# EAGLE board spb (EAGLE 5.10)
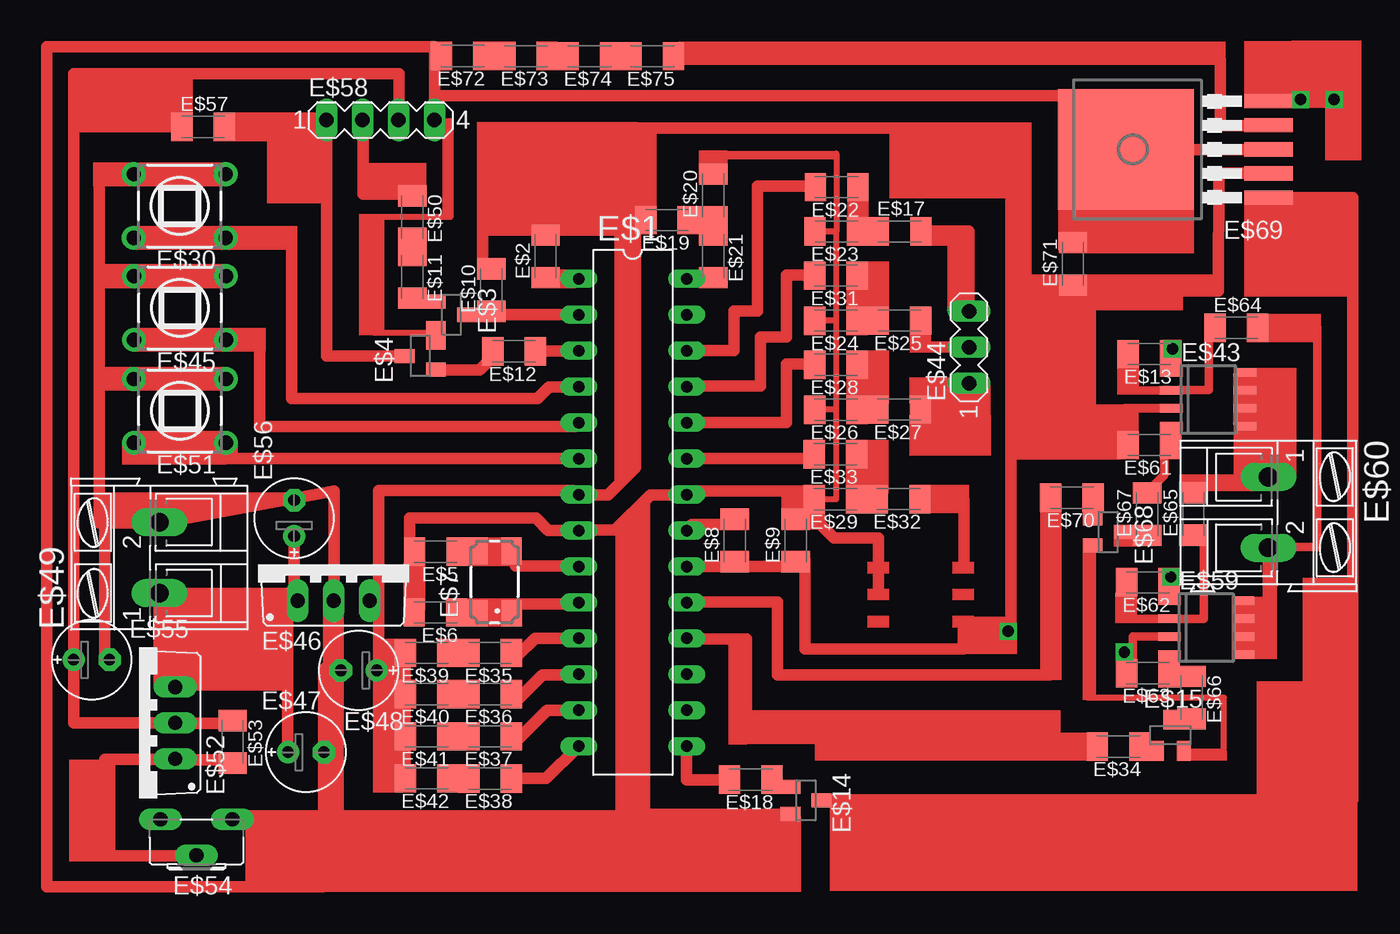
[diagram p0: board, top side]

No outline drawn. Coordinates in mm, seen from the top.
Copper layers (1*16): Top 0.035mm / dielectric 1.5mm / Bottom 0.035mm
Design rules "default": minimum track width 10mil, minimum drill 24mil, track to track 8mil, track to pad 8mil, pad to pad 8mil, via to via 8mil, smd to smd 8mil, copper to edge 40mil, drill to drill 8mil, minimum pad ring 10mil, minimum via ring 8mil, stop-mask expansion 4mil, vias tented up to drill 0mil, thermal gap 10mil

## Footprints (pad centres in the part's own frame; a part is rotated, then mirrored left to right if it is on the bottom)
DIL28-3 = drill 0.813 long: 1 -16.51,-3.81; 2 -13.97,-3.81; 3 -11.43,-3.81; 4 -8.89,-3.81; 5 -6.35,-3.81; 6 -3.81,-3.81; 7 -1.27,-3.81; 8 1.27,-3.81; 9 3.81,-3.81; 10 6.35,-3.81; 11 8.89,-3.81; 12 11.43,-3.81; 13 13.97,-3.81; 14 16.51,-3.81; 15 16.51,3.81; 16 13.97,3.81; 17 11.43,3.81; 18 8.89,3.81; 19 6.35,3.81; 20 3.81,3.81; 21 1.27,3.81; 22 -1.27,3.81; 23 -3.81,3.81; 24 -6.35,3.81; 25 -8.89,3.81; 26 -11.43,3.81; 27 -13.97,3.81; 28 -16.51,3.81
C1206K = smd 1.5 x 2: 1 -1.5,0; 2 1.5,0
SOT23 = smd 1 x 1.4: 1 -0.95,-1.1; 2 0.95,-1.1; 3 0,1.1
CTS406 = smd 1.9 x 1.4: 1 -2.2,-1.2; 2 2.2,-1.2; 3 2.2,1.2; 4 -2.2,1.2
TL1105SP = drill 1 pad 1.676 round: 1 -2.25,3.25; 2 2.25,3.25; 3 -2.25,-3.25; 4 2.25,-3.25
SO8 = smd 0.6 x 1.6: 1 -1.905,-2.6; 2 -0.635,-2.6; 3 0.635,-2.6; 4 1.905,-2.6; 5 1.905,2.6; 6 0.635,2.6; 7 -0.635,2.6; 8 -1.905,2.6
MA03-1 = drill 1.016 long: 1 -2.54,0; 2 0,0; 3 2.54,0
TO220V = drill 1.016 long: 1 -2.54,-2.54; 2 0,-2.54; 3 2.54,-2.54
E2,5-6E = drill 0.813 pad 1.575 round: + -1.27,0 | drill 0.813 pad 1.575 octagon: - 1.27,0
AK300/2 = drill 1.321 long: 1 -2.515,0; 2 2.489,0
CA6H = drill 1.016 long: A -2.54,0; E 2.54,0; S 0,2.54
MA04-1 = drill 1.016 long: 1 -3.81,0; 2 -1.27,0; 3 1.27,0; 4 3.81,0
TO263-51 = smd 1 x 3.4: 1 -3.4,-6.6; 2 -1.7,-6.6; 3 0,-6.6; 4 1.7,-6.6; 5 3.4,-6.6 | smd 8.5 x 9.6: 6 0,3.5

## Placement (x,y rotation side)
E$1  [DIL28-3]  45.83,27.24 270 top
E$2  [C1206K]  39.68,45.34 90 top
E$3  [SOT23]  33.03,41.2 270 top
E$4  [SOT23]  30.83,38.3 90 top
E$5  [C1206K]  31.92,24.48 180 top
E$6  [C1206K]  31.9,20.18 180 top
E$7  [CTS406]  36.07,22.33 90 top
E$8  [C1206K]  53.04,25.26 90 top
E$9  [C1206K]  57.34,25.27 90 top
E$10  [C1206K]  35.84,42.96 90 top
E$11  [C1206K]  30.26,43.89 270 top
E$12  [C1206K]  37.45,38.62 180 top
E$13  [C1206K]  82.32,38.43 180 top
E$14  [SOT23]  58.07,6.91 270 top
E$15  [SOT23]  83.8,11.51 0 top
E$17  [C1206K]  64.69,47.09 0 top
E$18  [C1206K]  54.17,8.38 180 top
E$19  [C1206K]  48.26,47.89 180 top
E$20  [C1206K]  51.51,49.64 90 top
E$21  [C1206K]  51.51,45.33 270 top
E$22  [C1206K]  60.24,50.22 180 top
E$23  [C1206K]  60.21,47.09 180 top
E$24  [C1206K]  60.19,40.79 180 top
E$25  [C1206K]  64.66,40.8 180 top
E$26  [C1206K]  60.18,34.5 180 top
E$27  [C1206K]  64.65,34.51 180 top
E$28  [C1206K]  60.18,37.68 180 top
E$29  [C1206K]  60.14,28.18 180 top
E$30  [TL1105SP]  13.84,48.89 90 top
E$31  [C1206K]  60.19,43.97 180 top
E$32  [C1206K]  64.61,28.19 180 top
E$33  [C1206K]  60.14,31.36 180 top
E$34  [C1206K]  80.14,10.71 180 top
E$35  [C1206K]  35.75,17.32 180 top
E$36  [C1206K]  35.75,14.41 180 top
E$37  [C1206K]  35.75,11.43 180 top
E$38  [C1206K]  35.75,8.45 180 top
E$39  [C1206K]  31.27,17.32 180 top
E$40  [C1206K]  31.28,14.41 180 top
E$41  [C1206K]  31.28,11.43 180 top
E$42  [C1206K]  31.28,8.46 180 top
E$43  [SO8]  86.47,35.23 270 top
E$44  [MA03-1]  69.58,38.92 90 top
E$45  [TL1105SP]  13.86,41.69 90 top
E$46  [TO220V]  24.71,23.56 0 top
E$47  [E2,5-6E]  26.48,16.09 180 top
E$48  [E2,5-6E]  22.76,10.31 0 top
E$49  [AK300/2]  12.4,24.06 90 top
E$50  [C1206K]  30.26,48.1 270 top
E$51  [TL1105SP]  13.85,34.42 90 top
E$52  [TO220V]  10.98,12.38 90 top
E$53  [C1206K]  17.58,11.05 270 top
E$54  [CA6H]  15.02,5.57 180 top
E$55  [E2,5-6E]  7.62,16.84 0 top
E$56  [E2,5-6E]  21.92,26.84 90 top
E$57  [C1206K]  15.49,54.48 0 top
E$58  [MA04-1]  28.02,54.96 0 top
E$59  [SO8]  86.34,19.11 270 top
E$60  [AK300/2]  90.72,27.24 270 top
E$61  [C1206K]  82.31,32.01 180 top
E$62  [C1206K]  82.21,22.31 180 top
E$63  [C1206K]  82.21,15.9 180 top
E$64  [C1206K]  88.46,40.29 0 top
E$65  [C1206K]  85.43,27.13 90 top
E$66  [C1206K]  85.3,14.16 270 top
E$67  [C1206K]  82.16,27.12 90 top
E$68  [SOT23]  79.41,25.86 270 top
E$69  [TO263-51]  84.14,52.89 90 top
E$70  [C1206K]  76.85,28.29 180 top
E$71  [C1206K]  76.92,44.8 90 top
E$72  [C1206K]  33.81,59.49 180 top
E$73  [C1206K]  38.29,59.48 180 top
E$74  [C1206K]  42.76,59.47 180 top
E$75  [C1206K]  47.21,59.47 180 top

## Library data of the parts
E$1 = atmel
E$2 E$5 E$6 E$8-E$13 E$17-E$29 E$31-E$42 E$50 E$53 E$57 E$61-E$67 E$70-E$75 = resistor
E$3 E$4 E$14 E$15 E$68 = led
E$7 = crystal
E$30 E$45 E$51 = switch
E$43 E$59 = micro-philips
E$44 E$58 = con-lstb
E$46 E$52 = transistor-pnp
E$47 E$48 E$55 E$56 = rcl
E$49 E$60 = con-ptr500
E$54 = pot
E$69 = micro-siemens

## Nets
S$22: E$1.26

## Tracks (layer width: path | path; a pad name or v marks a point on that pad's centre or on a via)
S$1
  Top 0.813: 42.04,20.88 42.04,20.77 36.45,20.77
S$2
  Top 0.813: 42.03,23.45 37.57,23.45 37.57,24.89
S$3
  Top 0.813: 42.07,25.99 39.84,25.99 38.99,26.84 30.08,26.84 30.08,23.96
S$4
  Top 0.813: 49.64,28.49 47.08,28.49 44.59,26 41.78,26
S$5
  Top 0.813: 49.66,23.42 56.59,23.42 56.59,23.48
S$6
  Top 0.813: 49.57,25.95 50.03,26.41 53.21,26.41
S$7
  Top 0.813: 49.63,28.48 49.91,28.76 57.89,28.76 57.89,26.43
S$8
  Top 0.813: 42.08,41.22 34.06,41.22 34.06,41.26
S$9
  Top 0.813: 39.78,47.18 35.24,47.18 35.24,44.28
S$10
  Top 0.813: 31.95,37.32 35.03,37.32 35.94,38.23
S$11
  Top 0.813: 42.05,38.64 39.03,38.64 39.03,38.7
S$12
  Top 0.813: 42.02,28.49 44.1,28.49 46.03,30.42 46.03,47.19 40.13,47.19
S$13
  Top 0.813: 49.63,31.06 58.54,31.06 58.54,31.37
S$14
  Top 0.813: 69.56,41.49 69.56,47.1 66.29,47.1
S$15
  Top 0.813: 69.22,23.47 69.22,28.15 66.32,28.15
S$16
  Top 0.813: 66.19,40.75 66.19,38.93 69.62,38.93
S$17
  Top 0.813: 66.26,34.5 66.26,36.39 69.53,36.39
S$18
  Top 0.813: 24,16.09 24,10.54 24.02,10.54
S$19
  Top 0.813: 49.67,33.6 56.68,33.6 56.68,37.73 58.98,37.73
S$20
  Top 0.406: 58.73,34.54 60.16,34.54 | 58.66,40.82 60.09,40.82
S$21
  Top 0.813: 49.66,36.16 54.87,36.16 54.87,39.63 56.68,39.63 56.68,44.01 58.85,44.01
S$22
  Top 0.813: E$1.26 52.98,38.67 52.98,41.48 54.63,41.48 54.63,50.28 58.8,50.28
S$23
  Top 0.813: 63.17,21.6 63.18,25.44 60.04,25.44 59.05,26.42 57.71,26.42
S$24
  Top 0.813: 57.99,23.93 57.99,17.6 69.19,17.6 69.19,19.32
S$25
  Top 0.406: 51.49,51.44 51.49,52.6 60.21,52.6 60.21,47.09 | 58.8,28.19 60.21,28.19 60.21,47.09 | 60.21,47.09 59.08,47.09 59.08,47.08
S$26
  Top 0.813: 42.05,18.36 38.92,18.36 37.68,17.12
S$27
  Top 0.813: 42.05,15.78 39.47,15.78 37.7,14.01
S$28
  Top 0.813: 42.05,13.28 39.78,13.28 37.62,11.12
S$29
  Top 0.813: 41.97,10.7 39.72,8.45 37.51,8.45
S$30
  Top 0.813: 29.74,8.07 29.74,17.24 27.89,17.24 27.89,28.8 41.62,28.8
S$31
  Top 0.813: 24.01,16.12 24.36,16.47 24.36,21.07
S$32
  Top 0.813: 21.45,10.34 21.45,21.04 22.26,21.04
S$33
  Top 0.813: 24.74,20.99 24.75,28.75 12.34,26.47
S$34
  Top 0.813: 12.42,21.51 22.21,21.51 22.21,20.87
S$35
  Top 0.813: 45.99,27.21 45.99,5.82 23.99,5.83 23.99,10.82
S$36
  Top 0.813: 69.2,19.47 72.53,19.47 72.53,54.4 46.07,54.4 46.07,47.42
S$37
  Top 0.813: 41.98,31.05 17.08,31.05 17.08,32.12 10.58,32.12
S$38
  Top 0.813: 17.12,36.82 8.14,36.82 | 8.14,36.82 8.14,26.51 13.02,26.51 | 17.14,43.96 8.14,43.96 | 8.14,43.96 8.14,36.82 | 17.07,51.21 8.14,51.21 8.14,43.96
S$39
  Top 0.813: 42.02,33.57 41.77,33.32 19.5,33.32 19.5,39.51 10.56,39.51
S$40
  Top 0.813: 42.06,36.1 39.93,36.1 39.11,35.28 21.74,35.28 21.74,46.62 10.6,46.62
S$41
  Top 0.813: 13.52,14.89 13.52,21.44 13.57,21.44
S$42
  Top 0.813: 91.09,51.2 87.23,51.2 87.18,42.89 72.63,42.89 | 89.23,52.88 85.37,52.88
S$43
  Top 0.813: 13.58,12.35 17.78,12.35 17.78,12.51 | 13.56,9.76 17.76,9.76
S$44
  Top 0.813: 13.75,9.8 8.53,9.8 8.53,3 15.11,3
S$45
  Top 0.813: 17.58,5.43 17.58,5.83 24.98,5.83
S$46
  Top 0.813: 21.92,25.59 21.92,20.94 22.1,20.94
S$47
  Top 0.813: 13.99,54.52 13.99,54.48 6.52,54.48
S$48
  Top 0.813: 29.47,38.3 24.22,38.3 24.22,54.43 17.26,54.43
S$49
  Top 0.813: 30.13,49.72 26.79,49.72 26.79,54.93
S$50
  Top 0.813: 29.34,54.98 29.34,58.25 6.36,58.25 6.36,56.77 6.36,56.49 6.36,12.39 13.54,12.39
S$51
  Top 0.813: 23.96,5.89 23.96,0.8 4.46,0.8 4.46,60.13 31.84,60.13 31.84,54.92
S$52
  Top 0.406: 31.81,54.9 32.96,54.9 32.96,48.11 27.58,48.11 27.58,39.95 31.93,39.95
S$53
  Top 1.016: 90.82,24.85 90.82,20.8 89.23,20.8
S$54
  Top 1.016: 89.32,35.4 89.32,29.81 90.8,29.81
S$55
  Top 0.61: 83.94,35.85 81.28,35.85 81.28,37.86
S$56
  Top 0.61: 83.92,34.58 81.27,34.58 81.27,32.31
S$57
  Top 0.61: 83.85,19.74 81.16,19.74 81.16,21.7
S$58
  Top 0.61: 83.83,18.48 81.16,18.48 81.16,16.26
S$59
  Top 0.61: 84.2,35.89 86.52,35.89 86.52,40.98
S$60
  Top 0.61: 90.8,24.81 94.17,24.81 94.17,40.34 89.69,40.34
S$61
  Top 0.61: 83.96,19.74 86.18,19.74 86.18,26.04
S$62
  Top 0.61: 85.46,28.73 85.49,29.63 90.73,29.63
S$63
  Top 0.61: 82.2,28.71 83.37,29.88 83.37,32.14
S$64
  Top 0.813: 75.28,28.51 75.28,15.76 56.05,15.76 56.05,20.92 49.66,20.92
S$65
  Top 0.813: 49.59,18.33 53.88,18.33 53.88,11.29 78.44,11.29
S$66  (via drill 0.8)
  other vias: 72.35,18.85 83.95,38.8 80.55,17.39 93,56.41 95.37,56.41
S$67  (via drill 0.8)
  other vias: 83.83,22.69
S$68
  Top 0.406: 84.76,10.37 87.58,10.37 87.58,14.16 77.96,14.16 77.96,25
S$69
  Top 0.813: 90.05,54.58 87.32,54.58 87.32,59.25 49,59.25
S$70
  Top 0.813: 31.87,54.87 31.87,56.7 77.47,56.7
S$71
  Top 0.813: 59.29,6.94 96.67,6.94 96.67,49.49 90.44,49.49
S$72
  Top 0.813: 57.06,5.94 46,5.94 46,7.19
S$73
  Top 0.813: 49.63,10.78 49.63,8.35 52.79,8.35
S$74
  Top 0.813: 80.8,31.99 80.8,34.48 72.65,34.48
S$75
  Top 0.813: 8.91,16.77 8.53,16.77 8.53,27.11
(copper drawn outside any net)
  shapes: Top area x104